# Altium PCB zWatch.PcbDoc
Units mil, origin at the board's own origin, x right, y up, seen from the top; angles counter-clockwise.
Board outline 6000 x 4000 mil, 2 copper layers (Top Layer, Bottom Layer); 29 components, 24 nets, 123 pads, 0 vias.
Unrouted connection lines stored in the file: 76.
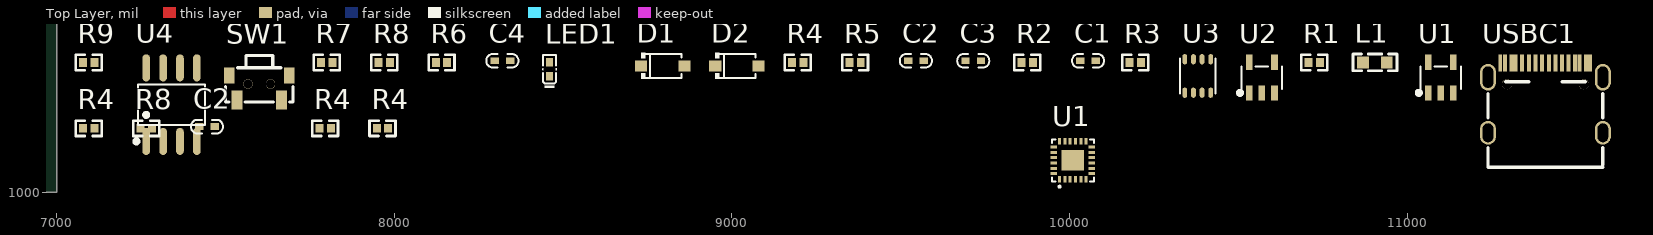
[diagram p0: Top Layer view]
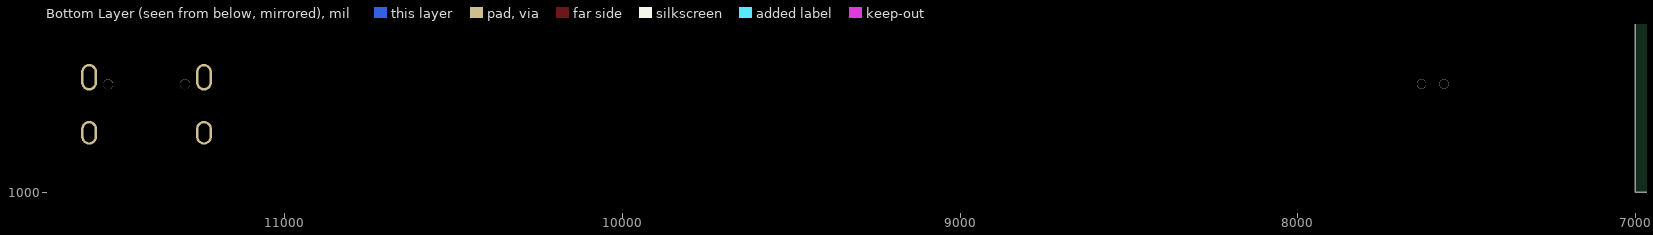
[diagram p1: Bottom Layer view, seen from below]

## Layer stack, top to bottom
Top Solder: solder mask 0.4, Solder Resist, Dk 3.5
Top Layer: signal copper 1.4
Dielectric 1: dielectric 12.6, FR-4, Dk 4.8
Bottom Layer: signal copper 1.4
Bottom Solder: solder mask 0.4, Solder Resist, Dk 3.5

## Board outline
1000,1000 7000,1000 7000,5000 1000,5000

## Design rules (kind name [scope] priority, off if disabled: settings)
Clearance [All] p1: gap=0 ignorepadtopadclearanceinfootprint=TRUE
PolygonConnect [All] p1: connectstyle=Relief reliefconductorwidth=10 reliefentries=4 polygonreliefangle="90 Angle" airgapwidth=10
RoutingVias [All] p1: holewidth=28 width=50 viastyle="Through Hole" minholewidth=28 minwidth=50 maxholewidth=28 maxwidth=50
SolderMaskExpansion [All] p1: expansion=4
Width [All] p1: maxlimit=10 minlimit=10 preferedwidth=10
30 further rules are at their usual default settings.

## Classes and differential pairs
component class zWatch: C1 C2 C3 C4 D1 D2 L1 LED1 R1 R2 R3 R4 R5 R6 R7 R8 R9 SW1 U1 U2 U3 U4 USBC1

## Components (designator, comment, footprint, x,y, rotation, side; value= is the part's Value field where it differs from the comment)
C1 "10uf" "C 0402" 10055,1390 r0 top
C2 "0.1uf" "C 0402" 7445,1195 r0 top
C2 "22pf" "C 0402" 9545,1390 r0 top
C3 "22uf" "C 0402" 9715,1390 r0 top
C4 "10uf" "C 0402" 8320,1390 r0 top
D1 "1N4148" SOD-123_L3.1-W1.7-LS3.7-RD 8795,1375 r0 top
D2 "1N4148" SOD-123_L3.1-W1.7-LS3.7-RD 9015,1375 r0 top
L1 "2.2uh" "L 0603" 10905,1385 r0 top
LED1 "绿色led" LED0402-RD 8460,1365 r90 top
R1 "0.5Ω" LC-0402_R 10725,1385 r0 top
R2 "330Ω" LC-0402_R 9875,1385 r0 top
R3 "100kΩ" LC-0402_R 10195,1385 r0 top
R4 "4.7kΩ" LC-0402_R 7795,1190 r0 top
R4 "4.7kΩ" LC-0402_R 7965,1190 r0 top
R4 "4.7kΩ" LC-0402_R 7095,1190 r0 top
R4 "4.7kΩ" LC-0402_R 9195,1385 r0 top
R5 "4.7kΩ" LC-0402_R 9365,1385 r0 top
R6 "2kΩ" LC-0402_R 8140,1385 r0 top
R7 "22kΩ" LC-0402_R 7800,1385 r0 top
R8 "10kΩ" LC-0402_R 7265,1190 r0 top
R8 "22kΩ" LC-0402_R 7970,1385 r0 top
R9 "1kΩ" LC-0402_R 7095,1385 r0 top
SW1 "3x6x5" SW-SMD_L4.7-W3.5-P3.35-EH 7600,1310 r0 top
U1 "MPU-9250" QFN-24_L3.0-W3.0-P0.40-BL-EP 10010,1095 r0 top
U1 "SY8089A1AAC" SOT-23-5_L3.0-W1.7-P0.95-LS2.8-BL 11100,1340 r0 top
U2 "LTH7R." SOT-23-5_L3.0-W1.7-P0.95-LS2.8-BL 10570,1340 r0 top
U3 "BME280" LGA-8_BME280_BR 10380,1345 r0 top
U4 "CH340N" SOP-8_L5.0-W4.0-P1.27-LS6.0-BL 7340,1260 r0 top
USBC1 "TYPE-C-31-M-12" USB-C_SMD-TYPE-C-31-M-12 11410,1280 r0 top

## Footprints (in the part's own frame and the unit in brackets; to place one, negate y for a bottom-side part, rotate by r counter-clockwise, add the part's x,y. Pads: shape width x height; smd on the part's side, far side on the other; paste and mask are expansions set on the pad)
"C 0402" [mil] "无极性贴片电容"
  rect 25x20 smd: 1(-23,0.16) 2(23,0.16)
  silkscreen extent -48,-20 48,20, body extent -20,-10 20,10, height 20
"L 0603" [mil] "小功率贴片电感"
  rect 35x35 smd: 1(-35,0) 2(35,0)
  silkscreen extent -65,-25 65,25, body extent -31,-16 31,16, height 31
LC-0402_R [mm]
  rect 0.6x0.65 smd mask+0.051: 1(-0.425,0) 2(0.425,0)
  silkscreen extent -0.97,-0.58 0.97,0.58, body extent -0.57,-0.27 0.58,0.28, height 0.41
LED0402-RD [mm]
  rect 0.636x0.54 smd: 1(-0.538,0) 2(0.538,0)
  silkscreen extent -1.39,-0.54 1.09,0.54
LGA-8_BME280_BR [mm]
  oval 0.364x0.767 smd: 1(0.975,-1.258) 2(0.325,-1.258) 3(-0.325,-1.258) 4(-0.975,-1.258) 5(-0.975,1.258) 6(-0.325,1.258) 7(0.325,1.258) 8(0.975,1.258)
  silkscreen extent -1.33,-1.33 1.33,1.33
QFN-24_L3.0-W3.0-P0.40-BL-EP [mm]
  rect 0.224x0.505 smd: 1(-1,-1.428) 2(-0.6,-1.428) 3(-0.2,-1.428) 4(0.2,-1.428) 5(0.6,-1.428) 6(1,-1.428) 13(1,1.428) 14(0.6,1.428) 15(0.2,1.428) 16(-0.2,1.428) 17(-0.6,1.428) 18(-1,1.428)
  rect 0.505x0.224 smd: 7(1.428,-1) 8(1.428,-0.6) 9(1.428,-0.2) 10(1.428,0.2) 11(1.428,0.6) 12(1.428,1) 19(-1.428,1) 20(-1.428,0.6) 21(-1.428,0.2) 22(-1.428,-0.2) 23(-1.428,-0.6) 24(-1.428,-1)
  rect 1.7x1.54 smd: 25(0,0)
  silkscreen extent -1.58,-2.05 1.58,1.58
SOD-123_L3.1-W1.7-LS3.7-RD [mm]
  rect 0.91x0.84 smd: 1(-1.63,0) 2(1.63,0)
  silkscreen extent -1.63,-0.98 1.4,0.98
SOP-8_L5.0-W4.0-P1.27-LS6.0-BL [mil]
  oval 22.6x80.14 smd: 1(-75,-108.97) 2(-25,-108.97) 3(25,-108.97) 4(75,-108.97) 5(75,108.97) 6(25,108.97) 7(-25,108.97) 8(-75,108.97)
  silkscreen extent -110,-115 99,60
SOT-23-5_L3.0-W1.7-P0.95-LS2.8-BL [mm]
  rect 0.49x1.157 smd: 1(-0.95,-1.154) 2(0,-1.154) 3(0.95,-1.154)
  rect 0.49x1.175 smd: 4(0.95,1.154) 5(-0.95,1.154)
  silkscreen extent -1.8,-1.29 1.53,0.85
SW-SMD_L4.7-W3.5-P3.35-EH [mm]
  rect 0.8x1.4 smd: 1(-1.675,-0.917) 2(1.675,-0.917)
  rect 0.8x1.2 smd: 3(-2.25,0.917) 4(2.25,0.917)
  round 0.7 hole 0.7 unplated: ""(-0.85,0.282) ""(0.85,0.282)
  silkscreen extent -2.54,-1.07 2.54,2.43
USB-C_SMD-TYPE-C-31-M-12 [mm]
  oval 1.2x1.8 hole 0.8 slot 1.4 at 90 deg: 0(-4.32,-2.624) 0(4.32,-2.624)
  oval 1.2x2 hole 0.8 slot 1.6 at 90 deg: 0(-4.32,1.556) 0(4.32,1.556)
  rect 0.3x1.3 smd: A1(-3.4,2.624) A4(-2.56,2.624) A5(-1.25,2.624) A6(-0.25,2.624) A7(0.25,2.624) A8(1.25,2.624) A9(2.55,2.624) A12(3.35,2.624) B1(3.05,2.624) B4(2.24,2.624) B5(1.75,2.624) B6(0.75,2.624) B7(-0.75,2.624) B8(-1.75,2.624) B9(-2.24,2.624) B12(-3.05,2.624)
  round 0.75 hole 0.75 unplated: ""(-2.89,1.026) ""(2.89,1.026)
  silkscreen extent -4.32,-5.23 4.32,1.22

## Part data
C1 C2 C2 C3 C4: library part C, "无极性贴片电容"
D1 D2: library part 1N4148W_C727110, BOM_JLCPCB Part Class="Extended Part", BOM_Manufacturer=TWGMC, BOM_Manufacturer Part=1N4148W, BOM_Supplier=LCSC, BOM_Supplier Part=C727110, Contributor=LCSC, spicePre=D, spiceSymbolName=1N4148W_C727110
L1: library part L, "小功率贴片电感"
LED1: library part 16-213/SDRC/S530-A3/TR8, BOM_JLCPCB Part Class="Extended Part", BOM_Manufacturer=EVERLIGHT, BOM_Manufacturer Part=16-213/SDRC/S530-A3/TR8, BOM_Supplier=LCSC, BOM_Supplier Part=C71911, spicePre=L, spiceSymbolName=16-213/SDRC/S530-A3/TR8
R1 R2 R3 R4 R4 R4 R4 R5 R6 R7 R8 R8 R9: library part "0402 0Ω (0R0) 1%", "贴片电阻", Package=0402, SuppliersPartNumber=C17168, ComponentLink1Description=供应商链接, ComponentLink1URL=http://www.szlcsc.com/product/details_17853.html, Supplier=LC
SW1: library part "TSW 3x6", "3x6轻触开关", BOM名称=3x6轻触开关, 学习资源=www.ooocke.com, 版权归属=源创客
U1: BOM_JLCPCB Part Class="Extended Part", BOM_Manufacturer=InvenSense, BOM_Manufacturer Part=MPU-9250, BOM_Supplier=LCSC, BOM_Supplier Part=C71459, Contributor=LCSC, spicePre=U, spiceSymbolName=MPU-9250
U1: BOM_JLCPCB Part Class="Extended Part", BOM_Manufacturer="Silergy Corp", BOM_Manufacturer Part=SY8089A1AAC, BOM_Supplier=LCSC, BOM_Supplier Part=C479074, Contributor=LCSC, spicePre=U, spiceSymbolName=SY8089A1AAC
U2: BOM_Manufacturer="Shenzhen Fuman Elec", JLCPCB Part Class="Extended Part", BOM_Manufacturer Part=LTH7R., BOM_Paste Type="Extended Part", BOM_Supplier=LCSC, BOM_Supplier Part=C841234, Contributor=LCSC, spicePre=U, spiceSymbolName=LTH7R.
U3: BOM_JLCPCB Part Class="Extended Part", BOM_Manufacturer=Bosch, BOM_Manufacturer Part=BME280, BOM_Supplier=LCSC, BOM_Supplier Part=C92489, Contributor=LCSC, spicePre=U, spiceSymbolName=BME280
U4: BOM_JLCPCB Part Class="Extended Part", BOM_Manufacturer="WCH(Jiangsu Qin Heng)", BOM_Manufacturer Part=CH340N, BOM_Supplier=LCSC, BOM_Supplier Part=C506813, Contributor=LCSC, spicePre=U, spiceSymbolName=CH340N
USBC1: BOM_JLCPCB Part Class="Extended Part", BOM_Manufacturer="Rectangular Connectors - Contacts", BOM_Manufacturer Part=TYPE-C-31-M-12, BOM_Supplier=LCSC, BOM_Supplier Part=C165948, Contributor=LCSC, spicePre=U, spiceSymbolName=TYPE-C-31-M-12

## Nets (pads, with @x,y where several pads share a name; then routed paths per layer and width w, separated by ;. In a path a pad name is that pad's centre, name@x,y a point inside that pad or via, vN(x,y) a via of type N, cw(c..) or ccw(c..) an arc to the next point about the centre after c; other vN are vias at no path point)
3.3V: C2.2@9568,1390.16 C3.2 L1.2 R3.2 R4.2 R5.2 U1.1@9970.63,1038.8 U1.8 U1.9 U1.13 U1.22 U3.2 U3.5 U3.6 U3.8 U4.5 U4.8
b-scl: R4.1@9178.27,1385 U3.4
b-sda: R5.1 U3.3
cc: R9.1 USBC1.A5 USBC1.B5
chrg: LED1.1 U2.1
dn: U4.2 USBC1.A7 USBC1.B7
dp: U4.1 USBC1.A6 USBC1.B6
GND: C1.1 C2.2@7468,1195.16 C3.1 C4.1 R6.1 R7.1 R8.1@7953.27,1385 R8.2@7281.73,1190 R9.2 U1.2@11100,1294.58 U1.18 U1.20 U1.25 U2.2 U3.1 U3.7 U4.3 USBC1.0 USBC1.A1 USBC1.A12 USBC1.B1 USBC1.B12
m-int: R4.1@7078.27,1190 U1.12
m-scl: R4.1@7948.27,1190 U1.23
m-sda: R4.1@7778.27,1190 U1.24
NetC2_1: C2.1@9522,1390.16 R3.1 R8.2@7986.73,1385 U1.5@11062.6,1385.42
NetD1_1: D1.1 D2.1 R7.2 U1.1@11062.6,1294.58
NetD2_2: D2.2 SW1.1
NetL1_1: L1.1 U1.3@11137.4,1294.58
NetLED1_2: LED1.2 R2.1
NetR1_2: R1.2 R2.2 U2.4
NetR6_2: R6.2 U2.5
NetR8_1: R8.1@7248.27,1190 U1.11
p-on: D1.2
rxd: U4.6
txd: U4.7
vbat: C1.2 C4.2 SW1.2 U1.4@11137.4,1385.42 U2.3
vbus: R1.1 USBC1.A4 USBC1.A9 USBC1.B4 USBC1.B9
pads on no net: C2.1@7422,1195.16 SW1. SW1.3 SW1.4 U1.2@9986.38,1038.8 U1.3@10002.13,1038.8 U1.4@10017.87,1038.8 U1.5@10033.62,1038.8 U1.6 U1.7 U1.10 U1.14 U1.15 U1.16 U1.17 U1.19 U1.21 U4.4 USBC1. USBC1.A8 USBC1.B8